# Altium PCB apt_battery_proj.PcbDoc
Units mm, origin at the board's own origin, x right, y up, seen from the top; angles counter-clockwise.
Board outline 190 x 373.65 mm, 2 copper layers (Top Layer, Bottom Layer); 12 components, 6 nets, 97 pads, 24 vias.
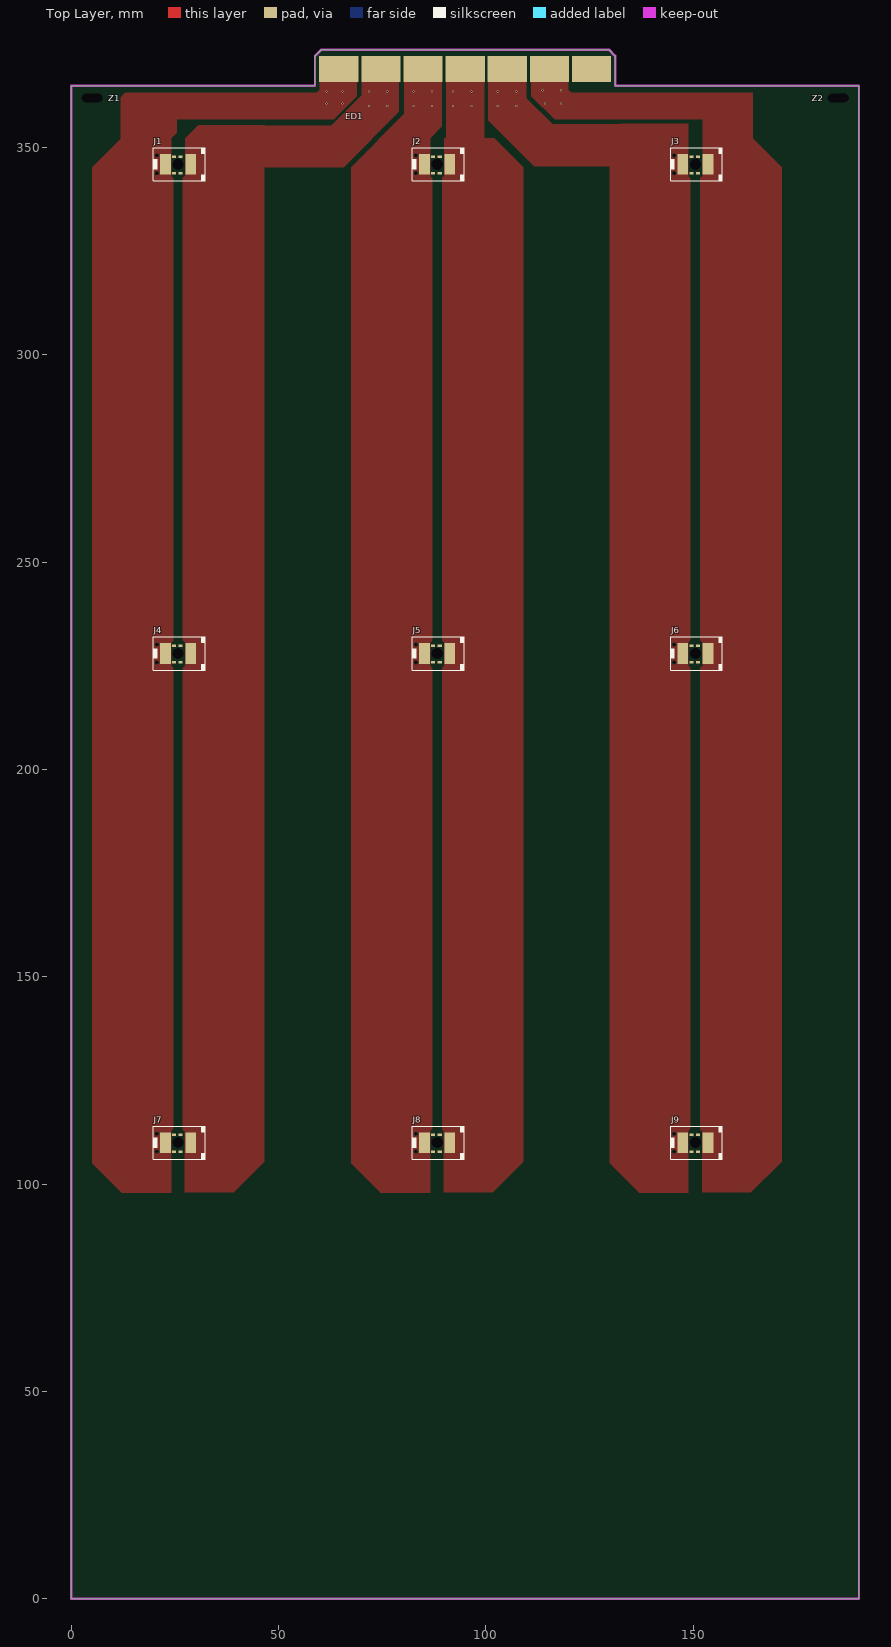
[diagram p0: Top Layer view]
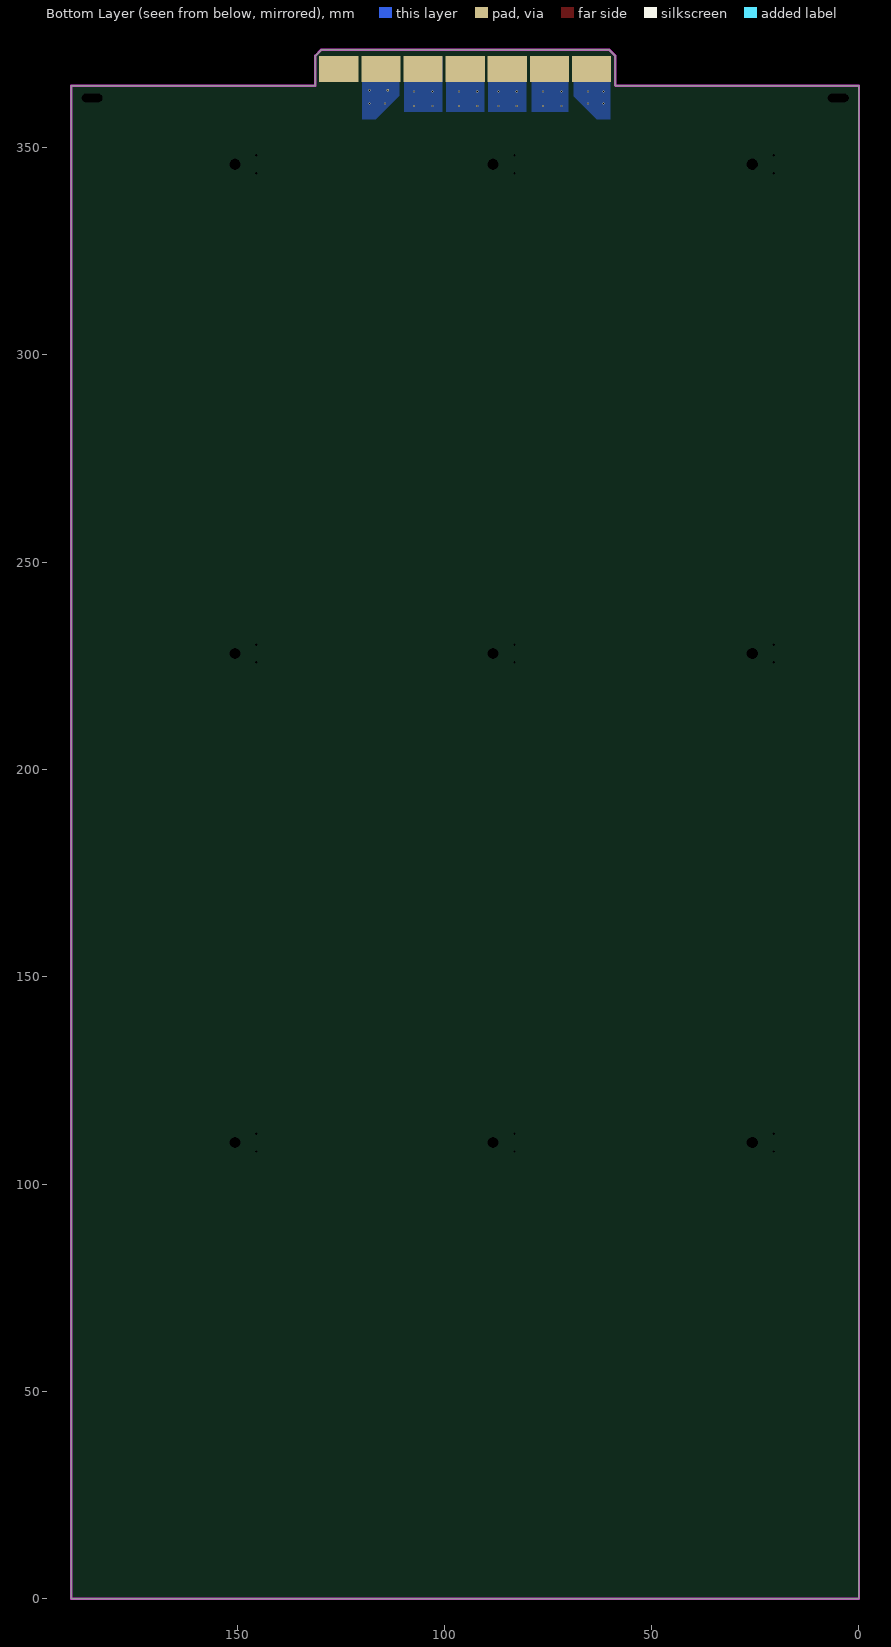
[diagram p1: Bottom Layer view, seen from below]

## Layer stack, top to bottom
Top Solder: solder mask 0.0102, Solder Resist, Dk 3.5
Top Layer: signal copper 0.0356
Dielectric 1: dielectric 0.32, FR-4, Dk 4.8
Bottom Layer: signal copper 0.0356
Bottom Solder: solder mask 0.0102, Solder Resist, Dk 3.5

## Board outline
58.7,365 58.775,365.075 58.775,372.125 60.3,373.65 129.675,373.65 131.175,372.15 131.175,365 190,365 190,0 0,0 0,365 4,365

## Design rules (kind name [scope] priority, off if disabled: settings)
BoardOutlineClearance [All] p1: gap=0.254 ignorepadtopadclearanceinfootprint=FALSE except(0: Arc-SplitContinuation Track-SplitContinuation SMDPad-SplitContinuation THPad-SplitContinuation Via-SplitContinuation Fill-SplitContinuation Poly-SplitContinuation Region-SplitContinuation Text-SplitContinuation)
Clearance "Clearance~Sunstone Circuits" [All] p1: gap=0.152 ignorepadtopadclearanceinfootprint=FALSE except(0: Arc-Hole Track-Hole SMDPad-Hole THPad-Hole Via-Hole Fill-Hole Poly-Hole Region-Hole Text-Hole) // Sunstone Circuits Minimum Clearance Rule (Double Sided)
HoleSize [All] p1: absolutevalues=TRUE maxlimit=5.08 minlimit=0.254 maxpercent=80.000 minpercent=20.000
MinimumSolderMaskSliver [All] p1: minsoldermaskwidth=0.152
PlaneConnect [All] p1: planeconnectstyle=Direct reliefexpansion=0.508 reliefentries=4 reliefconductorwidth=0.254 reliefairgap=0.254
PolygonConnect [All] p1: connectstyle=Direct reliefconductorwidth=0.254 reliefentries=4 polygonreliefangle="90 Angle" airgapwidth=0.254
RoomDefinition battery_cell [InComponentClass('battery_cell')] p1: confinementstyle=ConfineOut formatcopy=TRUE lockcomponents=FALSE outline 200.406,0 190.5,0 190.5,310.388 200.406,310.388
RoutingVias [All] p1: holewidth=0.711 width=1.27 viastyle="Through Hole" minholewidth=0.711 minwidth=1.27 maxholewidth=0.711 maxwidth=1.27
SolderMaskExpansion [All] p1: expansion=0.102
Width [All] p1: maxlimit=5.08 minlimit=0.254 preferedwidth=0.254 minimp=50.000000 maximp=50.000000 favimp=50.000000
27 further rules are at their usual default settings.

## Components (designator, comment, footprint, x,y, rotation, side; value= is the part's Value field where it differs from the comment)
ED1 "10119810-002LF - Edge Connector" "10119810-002LF - EDGE CONNECTOR" 95,369 r0 top
J1 "XBM-G028C" XBM-G028A 25.75,346 r180 top
J2 "XBM-G028C" XBM-G028A 88.25,346 r180 top
J3 "XBM-G028C" XBM-G028A 150.55,346 r180 top
J4 "XBM-G028C" XBM-G028A 25.75,228 r180 top
J5 "XBM-G028C" XBM-G028A 88.25,228 r180 top
J6 "XBM-G028C" XBM-G028A 150.55,228 r180 top
J7 "XBM-G028C" XBM-G028A 25.75,110 r180 top
J8 "XBM-G028C" XBM-G028A 88.25,110 r180 top
J9 "XBM-G028C" XBM-G028A 150.55,110 r180 top
Z1 "Zip tie holes" ZIP_TIE_HOLE#1 5.08,361.95 r180 top
Z2 "Zip tie holes" ZIP_TIE_HOLE#2 182.88,361.315 r180 top

## Footprints (in the part's own frame and the unit in brackets; to place one, negate y for a bottom-side part, rotate by r counter-clockwise, add the part's x,y. Pads: shape width x height; smd on the part's side, far side on the other; paste and mask are expansions set on the pad)
"10119810-002LF - EDGE CONNECTOR" [mm]
  rect 9.46x6.3 smd: P1-P4(30.48,0) P5-P8(20.32,0) P9-P12(10.16,0) P13-P16(0,0) P17-P20(-10.16,0) P21-P24(-20.32,0) P25-P28(-30.48,0)
  rect 9.46x6.3 smd far side: P29-P32(-30.48,0) P33-P36(-20.32,0) P37-P40(-10.16,0) P41-P44(0,0) P45-P48(10.16,0) P49-P52(20.32,0) P53-P56(30.48,0)
XBM-G028A [mm]
  rect 2.6x5 smd mask+0.06: AB(-3.048,0) EF(3.048,0)
  rect 1x0.6 smd mask+0.05: P1(-0.62,2.15) P2(0.98,2.15) P3(-0.62,-1.85) P4(0.98,-1.85)
  round 0 hole 2.7 unplated mask+0: P8(0,0)
  round 0 hole 0.58 unplated mask+0: P11(5.143,-2.145) P11(5.143,2.145)
  silkscreen extent -6.5,-4 6,4
ZIP_TIE_HOLE#1 [mm]
  round 0 hole 2.1 slot 5 at 0 deg unplated: P15(0.08,-0.05)
ZIP_TIE_HOLE#2 [mm]
  round 0 hole 2.1 slot 5 at 0 deg unplated: P15(-2.12,-0.685)

## Part data
ED1: Supplier Part Number 1=10119810-002LF-ND, Supplier 1=Digi-Key
J1 J2 J3 J4 J5 J6 J7 J8 J9: "28 pos power connector  (0.8X1.6mm pitch)-with post", Manufacturer=Neoconix, Manufacturer Part Number=XBM-G028C
Z1 Z2: library part ZIP_TIE_HOLE

## Via types
v1: diameter 0.508, hole 0.254, Top Layer to Bottom Layer, 24 vias

## Nets (pads, with @x,y where several pads share a name; then routed paths per layer and width w, separated by ;. In a path a pad name is that pad's centre, name@x,y a point inside that pad or via, vN(x,y) a via of type N, cw(c..) or ccw(c..) an arc to the next point about the centre after c; other vN are vias at no path point)
CELL_1+: ED1.P21-P24 ED1.P33-P36 J1.AB J4.AB J7.AB
  other v1: 71.755,360.045 76.2,360.045 71.755,363.525 76.2,363.525
CELL_1-: ED1.P25-P28 ED1.P29-P32 J1.EF J4.EF J7.EF
  other v1: 61.595,360.68 65.405,360.68 65.405,363.525 61.595,363.601
CELL_2+: ED1.P13-P16 ED1.P41-P44 J2.AB J5.AB J8.AB
  other v1: 92.075,360.045 96.52,360.045 92.075,363.525 96.52,363.525
CELL_2-: ED1.P17-P20 ED1.P37-P40 J2.EF J5.EF J8.EF
  other v1: 82.55,360.045 86.995,360.045 82.55,363.525 86.995,363.525
CELL_3+: ED1.P5-P8 ED1.P49-P52 J3.AB J6.AB J9.AB
  other v1: 114.3,360.68 118.11,360.68 113.665,363.855 118.11,363.855
CELL_3-: ED1.P9-P12 ED1.P45-P48 J3.EF J6.EF J9.EF
  other v1: 102.87,360.045 107.315,360.045 102.87,363.525 107.315,363.525
pads on no net: ED1.P1-P4 ED1.P53-P56 J1.P1 J1.P2 J1.P3 J1.P4 J1.P8 J1.P11 J2.P1 J2.P2 J2.P3 J2.P4 J2.P8 J2.P11 J3.P1 J3.P2 J3.P3 J3.P4 J3.P8 J3.P11 J4.P1 J4.P2 J4.P3 J4.P4 J4.P8 J4.P11 J5.P1 J5.P2 J5.P3 J5.P4 J5.P8 J5.P11 J6.P1 J6.P2 J6.P3 J6.P4 J6.P8 J6.P11 J7.P1 J7.P2 J7.P3 J7.P4 J7.P8 J7.P11 J8.P1 J8.P2 J8.P3 J8.P4 J8.P8 J8.P11 J9.P1 J9.P2 J9.P3 J9.P4 J9.P8 J9.P11 Z1.P15 Z2.P15

## Polygon pours and split planes (outlines as drawn)
CELL_1- on Top Layer "CELL_1-_L01_P052" (solid, pour order 52): 59.944,371.856
CELL_3+ on Top Layer "CELL_3+_L01_P050" (solid, pour order 50): 110.998,371.856 110.998,362.458 116.586,356.87 152.26,356.87 152.26,351.282 164.325,351.282 164.325,363.22 120.65,363.22 119.888,363.982 119.888,371.856
CELL_3- on Top Layer "CELL_3-_L01_P048" (solid, pour order 48): 100.584,371.856 100.584,356.616 111.633,345.567 145.439,345.567 148.844,352.323 148.844,355.854 116.072,355.606 109.728,361.95 109.728,371.856
CELL_1+ on Top Layer "CELL_1+_L01_P046" (solid, pour order 46): 78.994,371.602 78.994,358.648 65.659,345.313 34.139,345.313 27.432,352.298 30.734,355.6 62.749,355.357 70.104,362.712 70.104,371.602
CELL_1- on Top Layer "CELL_1-_L01_P044" (solid, pour order 44): 68.834,371.856 68.834,362.458 63.246,356.87 25.4,356.87 25.4,353.619 24.079,352.298 11.938,352.298 11.938,362.204 12.954,363.22 59.182,363.22 59.944,363.982 59.944,371.856
CELL_2+ on Top Layer "CELL_2+_L01_P042" (solid, pour order 42): 69.088,371.856
CELL_2+ on Top Layer "CELL_2+_L01_P040" (solid, pour order 40): 90.424,371.856 99.568,371.856 99.568,351.536 90.424,351.536
CELL_2- on Top Layer "CELL_2-_L01_P038" (solid, pour order 38): 80.264,371.856 89.408,371.856 89.408,355.194 86.538,352.323 80.264,352.323
CELL_3+ on Top Layer "CELL_3+_L01_P036" (solid, remove dead copper, pour order 36): 152.133,98.044 163.944,98.044 171.31,105.41 171.31,345.313 164.325,352.298 152.26,352.298 152.26,343.281 151.752,342.773 151.752,231.14 152.26,230.632 152.26,225.044 151.752,224.536 151.752,113.157 152.133,112.776
CELL_3- on Top Layer "CELL_3-_L01_P034" (solid, remove dead copper, pour order 34): 136.957,97.942 148.844,97.942 148.844,112.903 149.352,113.411 149.352,224.536 148.844,225.044 148.844,230.632 149.352,231.14 149.352,342.646 148.844,343.154 148.844,352.323 136.83,352.323 129.845,345.338 129.845,105.054
CELL_2+ on Top Layer "CELL_2+_L01_P032" (solid, remove dead copper, pour order 32): 89.802,98.019 101.613,98.019 108.979,105.385 108.979,345.288 101.994,352.273 89.929,352.273 89.929,343.256 89.421,342.748 89.421,231.115 89.929,230.607 89.929,225.019 89.421,224.511 89.421,113.132 89.802,112.751
CELL_2- on Top Layer "CELL_2-_L01_P030" (solid, remove dead copper, pour order 30): 74.651,97.942 86.538,97.942 86.538,112.903 87.046,113.411 87.046,224.536 86.538,225.044 86.538,230.632 87.046,231.14 87.046,342.646 86.538,343.154 86.538,358.14 80.34,358.14 67.539,345.338 67.539,105.054
CELL_1+ on Top Layer "CELL_1+_L01_P006" (solid, remove dead copper, pour order 6): 27.305,98.044 39.116,98.044 46.482,105.41 46.482,345.313 39.497,352.298 27.432,352.298 27.432,343.281 26.924,342.773 26.924,231.14 27.432,230.632 27.432,225.044 26.924,224.536 26.924,113.157 27.305,112.776
CELL_1- on Top Layer "CELL_1-_L01_P004" (solid, remove dead copper, pour order 4): 12.192,97.917 24.079,97.917 24.079,112.878 24.587,113.386 24.587,224.511 24.079,225.019 24.079,230.607 24.587,231.115 24.587,342.621 24.079,343.129 24.079,352.298 12.065,352.298 5.08,345.313 5.08,105.029
no net on Top Layer "NONET_L01_P002" (solid, pour order 2): 21.336,106.68
no net on Top Layer "NONET_L01_P000" (solid, pour order 0): 21.59,106.426
CELL_3+ on Bottom Layer "CELL_3+_L02_P066" (solid, pour order 66): 110.947,362.483 110.947,371.881 119.837,371.881 119.837,356.895 116.535,356.895
CELL_3- on Bottom Layer "CELL_3-_L02_P064" (solid, pour order 64): 100.584,371.856 109.728,371.856 109.728,358.648 100.584,358.648
CELL_2+ on Bottom Layer "CELL_2+_L02_P062" (solid, pour order 62): 90.424,371.856 99.568,371.856 99.568,358.648 90.424,358.648
CELL_2- on Bottom Layer "CELL_2-_L02_P060" (solid, pour order 60): 80.264,371.856 89.408,371.856 89.408,358.648 80.264,358.648
CELL_1+ on Bottom Layer "CELL_1+_L02_P058" (solid, pour order 58): 70.104,371.856 78.994,371.856 78.994,358.648 70.104,358.648
CELL_1+ on Bottom Layer "CELL_1+_L02_P056" (solid, pour order 56): 70.485,371.856
CELL_1- on Bottom Layer "CELL_1-_L02_P054" (solid, pour order 54): 68.834,362.458 68.834,371.856 59.944,371.856 59.944,356.87 63.246,356.87

## Keep-outs
Keep-Out Layer:
  lines w0.6: 4,365 58.7,365 58.775,365.075 58.775,372.125 60.3,373.65 129.675,373.65 131.175,372.15 131.175,365 190,365 190,0 0,0 0,365 4,365 ; 4,365 4,365

## Silkscreen, mask and mechanical layers (free items; w line width, h text height)
Outline:
  lines w0.6: 4,365 58.7,365 58.775,365.075 58.775,372.125 60.3,373.65 129.675,373.65 131.175,372.15 131.175,365 190,365 190,0 0,0 0,365 4,365 ; 4,365 4,365

## Dimensions
129.7,373.65 to 190,0 on Mechanical 1
0,365 to 190,365 on Mechanical 1